# Altium PCB powersupplyrelay.PcbDoc
Units mil, origin at the board's own origin, x right, y up, seen from the top; angles counter-clockwise.
Board outline 5275 x 2790 mil, 2 copper layers (Top Layer, Bottom Layer); 10 components, 9 nets, 33 pads, 0 vias.
Unrouted connection lines stored in the file: 17.
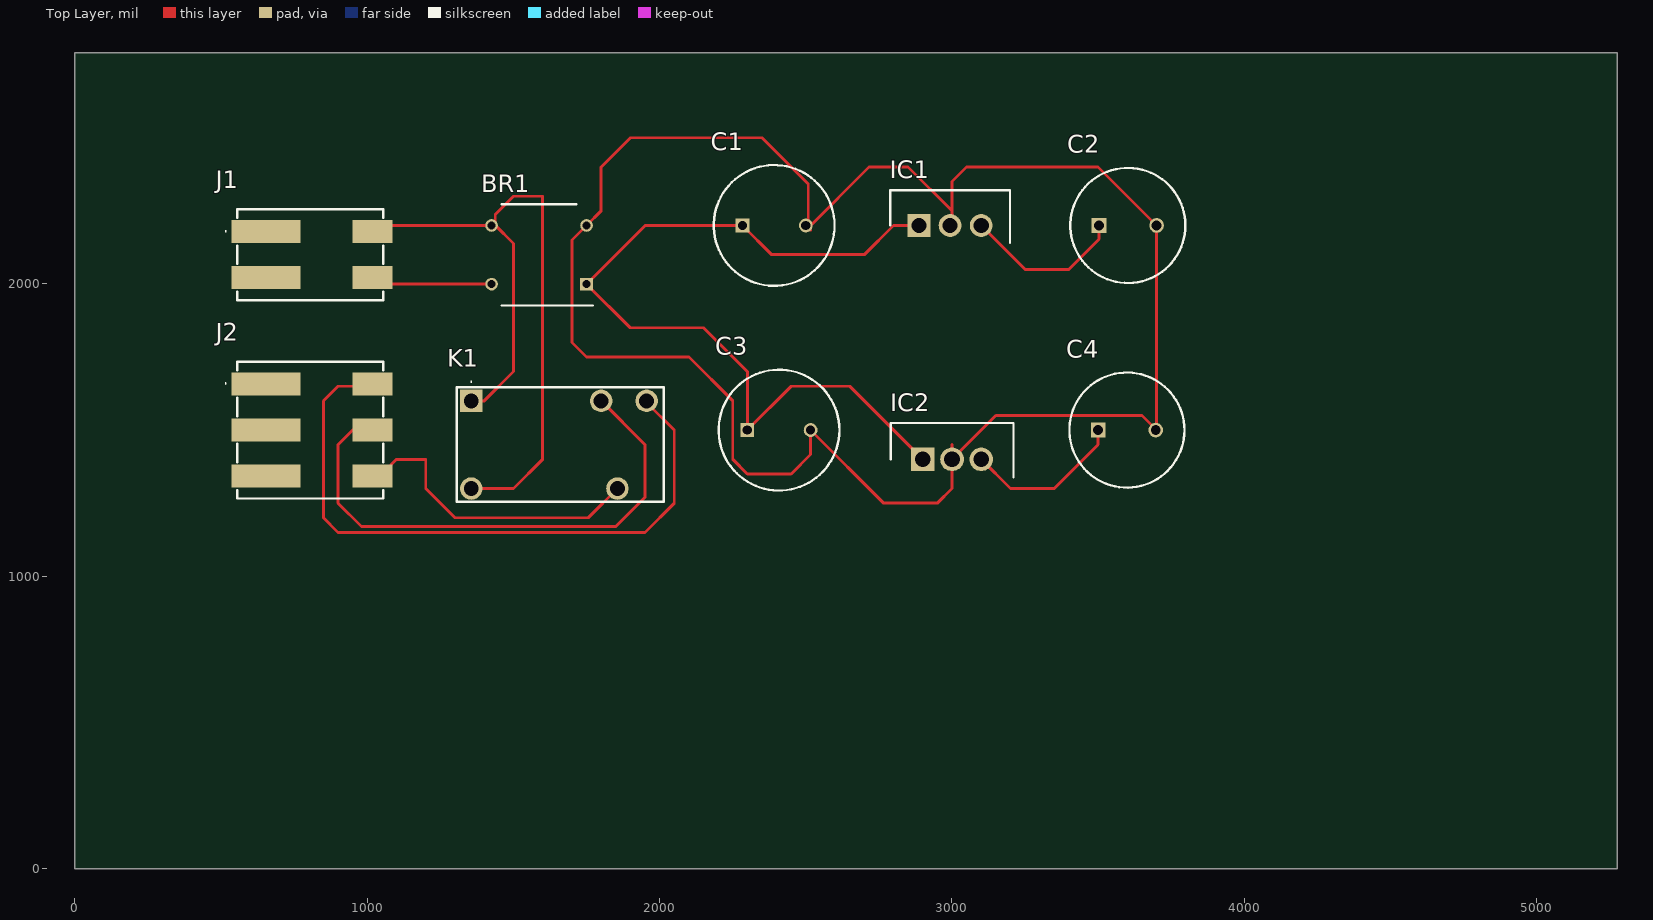
[diagram p0: Top Layer view]
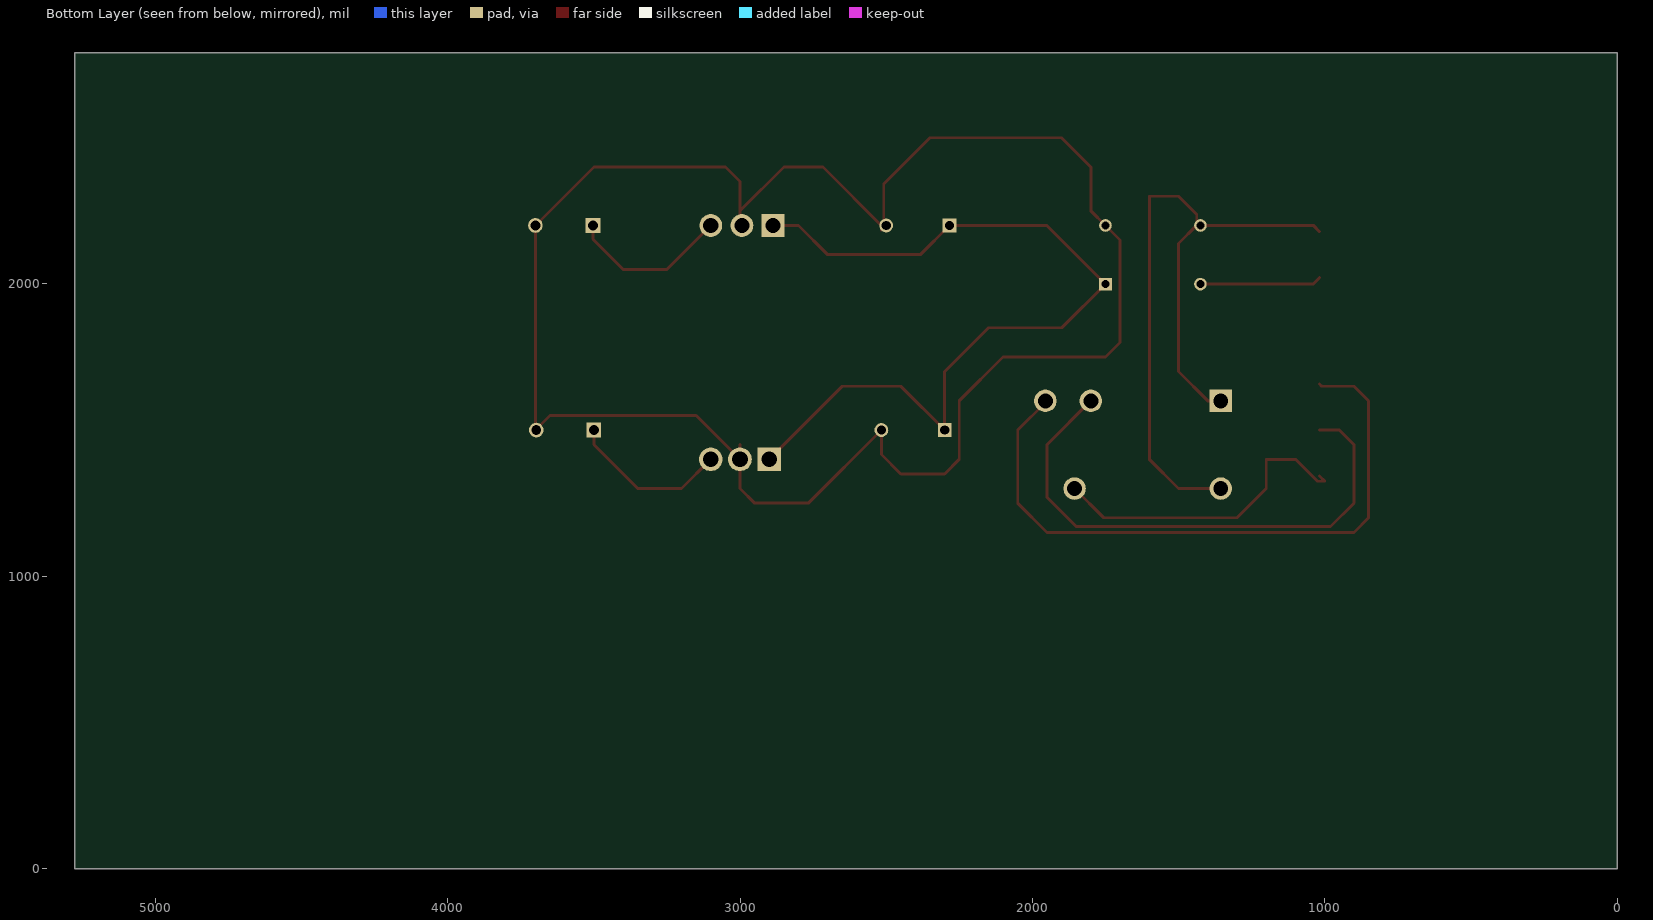
[diagram p1: Bottom Layer view, seen from below]

## Layer stack, top to bottom
Top Solder: solder mask 0.4, Solder Resist, Dk 3.5
Top Layer: signal copper 1.4
Dielectric 1: dielectric 12.6, FR-4, Dk 4.8
Bottom Layer: signal copper 1.4
Bottom Solder: solder mask 0.4, Solder Resist, Dk 3.5

## Board outline
0,0 5275,0 5275,2790 0,2790

## Design rules (kind name [scope] priority, off if disabled: settings)
Clearance [All] p1: gap=10 ignorepadtopadclearanceinfootprint=FALSE except(0: Arc-Hole Track-Hole SMDPad-Hole THPad-Hole Via-Hole Fill-Hole Poly-Hole Region-Hole Text-Hole)
PolygonConnect [All] p1: connectstyle=Relief reliefconductorwidth=10 reliefentries=4 polygonreliefangle="90 Angle" airgapwidth=10
RoutingVias [All] p1: holewidth=28 width=50 viastyle="Through Hole" minholewidth=28 minwidth=50 maxholewidth=28 maxwidth=50
SolderMaskExpansion [All] p1: expansion=4 istentingtop=FALSE
Width [All] p1: maxlimit=10 minlimit=10 preferedwidth=10
30 further rules are at their usual default settings.

## Classes and differential pairs
component class powersupplyrelay: BR1 C1 C2 C3 C4 IC1 IC2 J1 K1

## Components (designator, comment, footprint, x,y, rotation, side; value= is the part's Value field where it differs from the comment)
BR1 "DB107" DIP825W50P510L830H340Q4N 1587.6,2099.61 r180 top
C1 "1000uf" CAPPRD550W60D1050H2150 2283.46,2200 r0 top
C2 "100uf" CAPPRD500W65D1000H3200 3503.15,2200 r0 top
C3 "1000uf" CAPPRD550W60D1050H2150 2300,1500 r0 top
C4 "100uf" CAPPRD500W65D1000H3200 3500,1500 r0 top
IC1 "L7806CV" TO270P460X1020X2008-3P 2887.4,2200 r0 top
IC2 "LM7812ACT" TO254P470X1016X2019-3P 2900.39,1400 r0 top
J1 "2060-452_998-404" 2060452998404 800,2100 r0 top
J2 "2060-453_998-404" 2060453998404 800,1500 r0 top (schematic designator J?)
K1 "J0971CS5VDC.45" J0971CS5VDC45 1355.51,1600 r0 top

## Footprints (in the part's own frame and the unit in brackets; to place one, negate y for a bottom-side part, rotate by r counter-clockwise, add the part's x,y. Pads: shape width x height; smd on the part's side, far side on the other; paste and mask are expansions set on the pad)
2060452998404 [mm]
  rect 6x2 smd: 1(-3.725,2) 3(-3.725,-2)
  rect 3.5x2 smd: 2(5.525,2) 4(5.525,-2)
  silkscreen extent -7.27,-3.95 6.48,3.95, body extent -6.55,-3.95 6.55,3.95, height 4.5
2060453998404 [mm]
  rect 6x2 smd: 1(-3.725,4) 3(-3.725,0) 5(-3.725,-4)
  rect 3.5x2 smd: 2(5.525,4) 4(5.525,0) 6(5.525,-4)
  silkscreen extent -7.27,-5.95 6.48,5.95, body extent -6.55,-5.95 6.55,5.95, height 4.5
CAPPRD500W65D1000H3200 [mm]
  rect 1.275x1.275 hole 0.85: 1(0,0)
  round 1.275 hole 0.85: 2(5,0)
  silkscreen extent -2.5,-5 7.5,5, body extent -2.73,-5.25 7.75,5.25, height 32
CAPPRD550W60D1050H2150 [mm]
  rect 1.2x1.2 hole 0.8: 1(0,0)
  round 1.2 hole 0.8: 2(5.5,0)
  silkscreen extent -2.5,-5.25 8,5.25, body extent -2.5,-5.24 8,5.24, height 21.5
DIP825W50P510L830H340Q4N [mm]
  rect 1.1x1.1 hole 0.7: 1(-4.125,2.55)
  round 1.1 hole 0.7: 2(-4.125,-2.55) 3(4.125,-2.55) 4(4.125,2.55)
  silkscreen extent -4.67,-4.4 3.25,4.4, body extent -4.25,-4.15 4.25,4.15, height 3.4
J0971CS5VDC45 [mm]
  rect 1.95x1.95 hole 1.3: 1(0,0)
  round 1.95 hole 1.3: 2(0,-7.62) 3(12.7,-7.62) 4(15.24,0) 5(11.29,0)
  silkscreen extent -1.27,-8.78 16.73,1.7, body extent -1.28,-8.78 16.74,1.17, height 15.4
TO254P470X1016X2019-3P [mm]
  rect 2.055x2.055 hole 1.37: 1(0,0)
  round 2.055 hole 1.37: 2(2.535,0) 3(5.07,0)
  silkscreen extent -2.8,-1.55 7.87,3.15, body extent -2.55,-1.55 7.61,3.15, height 18.54
TO270P460X1020X2008-3P [mm]
  rect 1.98x1.98 hole 1.32: 1(0,0)
  round 1.98 hole 1.32: 2(2.7,0) 3(5.4,0)
  silkscreen extent -2.5,-1.53 7.9,3.07, body extent -2.4,-1.53 7.8,3.07, height 19.22

## Part data
BR1: "Bridge Rectifier", Manufacturer_Name=Rectron, Mouser Part Number=583-DB107, Datasheet Link=https://www.rectron.com/data_sheets/db101-107.pdf, Height=3.4mm, Manufacturer_Part_Number=DB107, Mouser Price/Stock=https://www.mouser.co.uk/ProductDetail/Rectron/DB107?qs=G5AQjGfRJcLGAY%252B6bEDnbw%3D%3D
C1 C3: library part 108CKE025M, "Capacitor Polarised", Manufacturer_Name="Cinch Connectivity Solutions", Datasheet Link=https://componentsearchengine.com/Datasheets/2/108CKE025M.pdf, Height=21.5mm, Manufacturer_Part_Number=108CKE025M
C2 C4: library part EEU-FC2A101L, "Capacitor Polarised", Manufacturer_Name=Panasonic, Mouser Part Number=667-EEU-FC2A101L, Arrow Part Number=EEU-FC2A101L, Arrow Price/Stock=https://www.arrow.com/en/products/eeu-fc2a101l/panasonic?region=nac, Datasheet Link=http://industrial.panasonic.com/cdbs/www-data/pdf/RDF0000/ABA0000C1209.pdf, Height=32mm, Manufacturer_Part_Number=EEU-FC2A101L, Mouser Price/Stock=https://www.mouser.co.uk/ProductDetail/Panasonic/EEU-FC2A101L?qs=MtOUKumLmnYYrYsMGpDvcw%3D%3D
IC1: "Integrated Circuit", Manufacturer_Name=STMicroelectronics, Mouser Part Number=511-L7806CV, Arrow Part Number=L7806CV, Arrow Price/Stock=https://www.arrow.com/en/products/l7806cv/stmicroelectronics?region=europe, Datasheet Link=http://www.st.com/web/en/resource/technical/document/datasheet/CD00000444.pdf, Height=4.6mm, Manufacturer_Part_Number=L7806CV, Mouser Price/Stock=https://www.mouser.co.uk/ProductDetail/STMicroelectronics/L7806CV?qs=K4DpzJ20gDEC%252BHE13eVUwg%3D%3D
IC2: "Integrated Circuit", Manufacturer_Name=onsemi, Mouser Part Number=512-LM7812ACT, Arrow Part Number=LM7812ACT, Arrow Price/Stock=https://www.arrow.com/en/products/lm7812act/on-semiconductor, Datasheet Link=https://datasheet.datasheetarchive.com/originals/distributors/Datasheets_SAMA/704b005d7d2d9ced5864f40b6609c1bc.pdf, Height=4.7mm, Manufacturer_Part_Number=LM7812ACT, Mouser Price/Stock=https://www.mouser.com/Search/Refine.aspx?Keyword=512-LM7812ACT
J1: "Connector", Arrow Part Number=2060-452/998-404, Manufacturer_Name=Wago, Arrow Price/Stock=https://www.arrow.com/en/products/2060-452998-404/wago-kontakttechnik-gmbh?region=nac, Datasheet Link=https://www.wago.com/2060-452/998-404, Height=4.5mm, Manufacturer_Part_Number=2060-452/998-404
J2: "Connector", Arrow Part Number=2060-453/998-404, Manufacturer_Name=Wago, Arrow Price/Stock=https://www.arrow.com/en/products/2060-453998-404/wago-kontakttechnik-gmbh?region=europe, Datasheet Link=https://www.wago.com/2060-453/998-404, Height=4.5mm, Manufacturer_Part_Number=2060-453/998-404
K1: "Relay or Contactor", Manufacturer_Name="CIT Relay & Switch", Datasheet Link="https://www.citrelay.com/Catalog Pages/RelayCatalog/J097.pdf", Height=15.3mm, Manufacturer_Part_Number=J0971CS5VDC.45

## Nets (pads, with @x,y where several pads share a name; then routed paths per layer and width w, separated by ;. In a path a pad name is that pad's centre, name@x,y a point inside that pad or via, vN(x,y) a via of type N, cw(c..) or ccw(c..) an arc to the next point about the centre after c; other vN are vias at no path point)
GND: BR1.2 C1.2 C2.2 C3.2 C4.2 IC1.2 IC2.2 | length 8.9
  Top Layer w10: IC1.2@3000,2200 IC1.2@3006.3,2206.3
NetBR1_1: BR1.1 C1.1 C3.1 IC1.1 IC2.1
NetBR1_3: BR1.3 J1.2 K1.2
NetBR1_4: BR1.4 J1.4 K1.1
NetC2_1: C2.1 IC1.3
NetC4_1: C4.1 IC2.3
NetJ?_2: J2.2 K1.4 | length 2242.6
  Top Layer w10: J2.2 1010.04,1650 900,1650 850,1600 850,1200 900,1150 1950,1150 2050,1250 2050,1500 1955.51,1594.49 K1.4
NetJ?_4: J2.4 K1.5 | length 1854.9
  Top Layer w10: J2.4 950,1500 900,1450 900,1250 980,1170 1850,1170 1950,1270 1950,1450 K1.5
NetJ?_6: J2.6 K1.3
pads on no net: J1.1 J1.3 J2.1 J2.3 J2.5
copper on no net: | length 14928.3
  Top Layer w10: 1017.52,1342.52 1000,1325 1025,1325 1100,1400 1200,1400 1200,1300 1300,1200 1700,1200 1755.51,1200 1855.51,1300 ; 1017.52,2021.26 1039.17,1999.61 1437.6,1999.61 ; 1017.52,2178.74 1039.17,2200.39 1437.6,2200.39 ; 1355.51,1300 1500,1300 1600,1400 1600,2300 1500,2300 1437.6,2237.6 1437.6,2200.39 ; 1355.51,1600 1400,1600 1500,1700 1500,2137.99 1437.6,2200.39 ; 1750,2212.8 1762.4,2200.39 ; 1762.4,1999.61 1762.8,2000 ; 2283.46,2183.46 2283.46,2200 ; 2300,2200 2283.46,2200 ; 2500,2200 2516.54,2183.46 ; 2887.4,2200 2800,2200 2700,2100 2383.46,2100 2283.46,2200 ; 2900,1400 2650,1650 2450,1650 2300,1500 2300,1700 2150,1850 1899.21,1850 1750,1999.21 1950.79,2200 2283.46,2200 ; 3000,1450 3000,1400 ; 3100,1400 3200,1300 3350,1300 3500,1450 3500,1500 ; 3100,2200 3250,2050 3400,2050 3503.15,2153.15 3503.15,2200 ; 3696.85,2196.85 3700,2200 ; 3000,1400 3150,1550 3650,1550 3700,1500 3700,2200 ; 3000,1400 3000,1300 2950,1250 2766.54,1250 2516.54,1500 2516.54,1416.54 2450,1350 2300,1350 2250,1400 2250,1600 2100,1750 1750,1750 1700,1800 1700,2150 1750,2200 1800,2250 1800,2400 1900,2500 2350,2500 2508.27,2341.73 2508.27,2191.73 2716.54,2400 2850,2400 3000,2250 3000,2200 3000,2350 3050,2400 3500,2400 3700,2200